# EAGLE board CT_schematic (EAGLE 7.6.0)

Size 100 x 80 mm. Coordinates in mm from the lower left corner, seen from the top.
Outline: 0,0 100,0 100,80 0,80 0,0
Copper layers (1*16): Top 0.035mm / dielectric 1.5mm / Bottom 0.035mm
Design rules "default": minimum track width 10mil, minimum drill 24mil, track to track 8mil, track to pad 8mil, pad to pad 8mil, via to via 8mil, smd to smd 8mil, copper to edge 40mil, drill to drill 8mil, minimum pad ring 10mil, minimum via ring 8mil, stop-mask expansion 4mil, vias tented up to drill 0mil, thermal gap 10mil

## Footprints (pad centres in the part's own frame; a part is rotated, then mirrored left to right if it is on the bottom)
C0603 = smd 0.8 x 0.8: 1 -0.762,0; 2 0.762,0
C0402 = smd 0.5 x 0.5: 1 -0.508,0; 2 0.508,0
C1210 = smd 1.2 x 2.5: 1 -1.524,0; 2 1.524,0
C0805 = smd 1.2 x 1.3: 1 -1.016,0; 2 1.016,0
R0603 = smd 0.8 x 0.8: 1 -0.762,0; 2 0.762,0
EXV-9H = smd 3.505 x 1.676: 1 -2.857,0; 2 2.857,0
L0603 = smd 0.8 x 0.8: 1 -0.762,0; 2 0.762,0
PJ-037B_PACKAGE = drill 3.7 square: 1 12,0 | drill 3.2 square: 2 6,0
UFQFPN48 = smd 0.559 x 0.305: 1 -3.375,2.751; 2 -3.375,2.251; 3 -3.375,1.75; 4 -3.375,1.25; 5 -3.375,0.75; 6 -3.375,0.25; 7 -3.375,-0.25; 8 -3.375,-0.75; 9 -3.375,-1.25; 10 -3.375,-1.75; 11 -3.375,-2.251; 12 -3.375,-2.751; 25 3.375,-2.751; 26 3.375,-2.251; 27 3.375,-1.75; 28 3.375,-1.25; 29 3.375,-0.75; 30 3.375,-0.25; 31 3.375,0.25; 32 3.375,0.75; 33 3.375,1.25; 34 3.375,1.75; 35 3.375,2.251; 36 3.375,2.751 | smd 0.305 x 0.559: 13 -2.751,-3.375; 14 -2.251,-3.375; 15 -1.75,-3.375; 16 -1.25,-3.375; 17 -0.75,-3.375; 18 -0.25,-3.375; 19 0.25,-3.375; 20 0.75,-3.375; 21 1.25,-3.375; 22 1.75,-3.375; 23 2.251,-3.375; 24 2.751,-3.375; 37 2.751,3.375; 38 2.251,3.375; 39 1.75,3.375; 40 1.25,3.375; 41 0.75,3.375; 42 0.25,3.375; 43 -0.25,3.375; 44 -0.75,3.375; 45 -1.25,3.375; 46 -1.75,3.375; 47 -2.251,3.375; 48 -2.751,3.375 | smd 5.588 x 5.588: 49 0,0
SOT-23-6 = smd 1.1 x 0.6: 1 -1.4,0.95; 2 -1.4,0; 3 -1.4,-0.95; 4 1.4,-0.95; 5 1.4,0; 6 1.4,0.95
AT24C02D = smd 1.6 x 0.6: 1 -2.475,1.905 | smd 1.55 x 0.6: 2 -2.475,0.635; 3 -2.475,-0.635; 4 -2.475,-1.905; 5 2.475,-1.905; 6 2.475,-0.635; 7 2.475,0.635; 8 2.475,1.905
QFN-32 = smd 0.6 x 0.3: 1 -2.3,1.75; 2 -2.3,1.25; 3 -2.3,0.75; 4 -2.3,0.25; 5 -2.3,-0.25; 6 -2.3,-0.75; 7 -2.3,-1.25; 8 -2.3,-1.75; 17 2.3,-1.75; 18 2.3,-1.25; 19 2.3,-0.75; 20 2.3,-0.25; 21 2.3,0.25; 22 2.3,0.75; 23 2.3,1.25; 24 2.3,1.75 | smd 0.3 x 0.6: 9 -1.75,-2.3; 10 -1.25,-2.3; 11 -0.75,-2.3; 12 -0.25,-2.3; 13 0.25,-2.3; 14 0.75,-2.3; 15 1.25,-2.3; 16 1.75,-2.3; 25 1.75,2.3; 26 1.25,2.3; 27 0.75,2.3; 28 0.25,2.3; 29 -0.25,2.3; 30 -0.75,2.3; 31 -1.25,2.3; 32 -1.75,2.3 | smd 3.2 x 3.2: EXP 0,0
SJ-43515TS-SMT-TR = smd 2.2 x 3: 1 0.6,-7.4; 4 3.4,-7.4 | smd 3 x 3: 2 12.8,-7.4; 5 17,-3 | smd 2 x 3: 3 5.3,0; 6 2.5,0 | drill 1.8: P$7 4.5,-3.69; P$8 11.54,-3.69
WM-64PC = drill 0.6 pad 1: 1 -1,0.95; 2 -1,-0.95
SI7034-A10-IM = smd 0.75 x 0.4: 1 -1,0.5; 2 -1,-0.5; 4 1,-0.5; 5 1,0.5 | smd 0.8 x 1.7: 3 0,0
USB-A-H = drill 0.914: 1 2.718,3.493; 2 2.718,1.003; 3 2.718,-1.003; 4 2.718,-3.493 | drill 2.311: 5 0,-6.566; 6 0,6.566
SOT143B = smd 1 x 0.7: 1 -0.75,-1 | smd 0.6 x 0.7: 2 0.95,-1; 3 0.95,1; 4 -0.95,1
QFN-28 = smd 0.813 x 0.305: 1 -2.451,1.5; 2 -2.451,1; 3 -2.451,0.5; 4 -2.451,0; 5 -2.451,-0.5; 6 -2.451,-1; 7 -2.451,-1.5; 15 2.451,-1.5; 16 2.451,-1; 17 2.451,-0.5; 18 2.451,0; 19 2.451,0.5; 20 2.451,1; 21 2.451,1.5 | smd 0.305 x 0.813: 8 -1.5,-2.451; 9 -1,-2.451; 10 -0.5,-2.451; 11 0,-2.451; 12 0.5,-2.451; 13 1,-2.451; 14 1.5,-2.451; 22 1.5,2.451; 23 1,2.451; 24 0.5,2.451; 25 0,2.451; 26 -0.5,2.451; 27 -1,2.451; 28 -1.5,2.451 | smd 3.607 x 3.607: 29 0,0
ABS07-32.768KHZ-7-T = smd 1.1 x 2.4: 1 -2.5,0; 2 0,0
ABLS-12.288MHZ-B4-T = smd 5.6 x 2.8: 1 -3.81,0; 2 5.69,0
ASFL1 = smd 1.7 x 1.5: 1 -1.27,-1.1; 2 1.27,-1.1; 3 1.27,1.1; 4 -1.27,1.1
WSON-8 = smd 0.3 x 0.6: 1 -0.75,0; 2 0.05,0; 3 0.85,0; 4 1.65,0; 5 1.65,3.8; 6 0.85,3.8; 7 0.05,3.8; 8 -0.75,3.8 | smd 3 x 2.6: PAD 0.45,1.9
SON-6 = smd 0.55 x 0.3: 1 -0.355,0.5 | smd 0.52 x 0.3: 2 -0.37,0; 3 -0.37,-0.5; 4 0.37,-0.5; 5 0.37,0; 6 0.37,0.5
SW_4-1437565-2 = smd 1.4 x 2.1: 1 -2.23,4.55; 2 -2.23,-4.55; 3 2.23,4.55; 4 2.23,-4.55
LGM67K-G1J2-24-Z = smd 0.8 x 1.4: A -2,0; C 0,0
NC7SZ125M5X = smd 1.3 x 0.7: 1 -1.3,0.95; 2 -1.3,0; 3 -1.3,-0.95; 4 1.3,-0.95; 5 1.3,0.95

## Placement (x,y rotation side)
C1  1e-06  [C0603]  -46.99,87.63 0 top  (outside the outline)
C2  1e-07  [C0603]  -50.8,87.63 0 top  (outside the outline)
C3  1e-07  [C0603]  -54.61,87.63 0 top  (outside the outline)
C4  1e-07  [C0603]  -58.42,87.63 0 top  (outside the outline)
C5  1e-07  [C0603]  -62.23,87.63 0 top  (outside the outline)
C6  1e-07  [C0603]  -66.04,87.63 0 top  (outside the outline)
C7  4.7e-06  [C0603]  -39.37,87.63 0 top  (outside the outline)
C8  2.2e-06  [C0603]  -43.18,87.63 0 top  (outside the outline)
C9  1e-08  [C0603]  -69.85,87.63 0 top  (outside the outline)
C10  1e-06  [C0603]  -73.66,87.63 0 top  (outside the outline)
C11  1e-11  [C0402]  -19.05,97.79 0 top  (outside the outline)
C12  1e-11  [C0402]  -22.86,97.79 0 top  (outside the outline)
C13  1e-08  [C0402]  -26.67,97.79 0 top  (outside the outline)
C14  1e-06  [C0603]  -77.47,87.63 0 top  (outside the outline)
C15  1e-06  [C0603]  -81.28,87.63 0 top  (outside the outline)
C16  1e-06  [C0603]  -85.09,87.63 0 top  (outside the outline)
C17  1e-06  [C0603]  -88.9,87.63 0 top  (outside the outline)
C18  1e-06  [C0603]  -92.71,87.63 0 top  (outside the outline)
C19  1e-06  [C0603]  -15.24,92.71 0 top  (outside the outline)
C20  1e-06  [C0603]  -19.05,92.71 0 top  (outside the outline)
C21  1e-07  [C0402]  -30.48,97.79 0 top  (outside the outline)
C22  1e-07  [C0402]  -34.29,97.79 0 top  (outside the outline)
C23  1e-07  [C0402]  -38.1,97.79 0 top  (outside the outline)
C24  1e-07  [C0402]  -41.91,97.79 0 top  (outside the outline)
C25  1e-06  [C0603]  -22.86,92.71 0 top  (outside the outline)
C26  1e-07  [C0402]  -45.72,97.79 0 top  (outside the outline)
C27  2.2e-05  [C1210]  -87.63,68.58 0 top  (outside the outline)
C28  2.2e-05  [C1210]  -16.51,77.47 0 top  (outside the outline)
C29  1e-09  [C0402]  -49.53,97.79 0 top  (outside the outline)
C30  1e-09  [C0402]  -53.34,97.79 0 top  (outside the outline)
C31  1e-07  [C0402]  -57.15,97.79 0 top  (outside the outline)
C32  1e-07  [C0402]  -60.96,97.79 0 top  (outside the outline)
C33  1e-07  [C0402]  -64.77,97.79 0 top  (outside the outline)
C34  1e-07  [C0402]  -68.58,97.79 0 top  (outside the outline)
C35  1e-07  [C0402]  -72.39,97.79 0 top  (outside the outline)
C36  1e-05  [C0805]  -58.42,76.2 0 top  (outside the outline)
C37  1e-05  [C0805]  -63.5,76.2 0 top  (outside the outline)
C38  1e-05  [C0805]  -68.58,76.2 0 top  (outside the outline)
C39  1e-05  [C0805]  -73.66,76.2 0 top  (outside the outline)
C40  1e-05  [C0805]  -78.74,76.2 0 top  (outside the outline)
C41  2.2e-11  [C0402]  -92.71,92.71 0 top  (outside the outline)
C42  2.2e-11  [C0402]  -15.24,97.79 0 top  (outside the outline)
C43  1e-08  [C0402]  -76.2,97.79 0 top  (outside the outline)
C44  1e-08  [C0402]  -80.01,97.79 0 top  (outside the outline)
C45  1e-08  [C0402]  -83.82,97.79 0 top  (outside the outline)
C46  1e-05  [C1210]  -22.86,77.47 0 top  (outside the outline)
C47  1e-05  [C0805]  -83.82,76.2 0 top  (outside the outline)
C48  8e-07  [R0603]  -26.67,92.71 0 top  (outside the outline)
C49  1e-05  [C1210]  -29.21,77.47 0 top  (outside the outline)
C50  1e-08  [C0402]  -87.63,97.79 0 top  (outside the outline)
C51  1e-05  [C1210]  -35.56,77.47 0 top  (outside the outline)
C52  1e-05  [C1210]  -41.91,77.47 0 top  (outside the outline)
C53  1e-07  [C0402]  -91.44,97.79 0 top  (outside the outline)
C54  0.0001  [EXV-9H]  -82.55,59.69 0 top  (outside the outline)
C55  0.0001  [EXV-9H]  -17.78,69.85 0 top  (outside the outline)
C56  1e-08  [C0402]  -15.24,102.87 0 top  (outside the outline)
F1  240.0  [L0603]  -30.48,92.71 0 top  (outside the outline)
J1  PJ-037B  [PJ-037B_PACKAGE]  -55.88,38.1 0 top  (outside the outline)
R1  10000.0  [R0603]  -45.72,82.55 0 top  (outside the outline)
R2  1000.0  [R0603]  -34.29,92.71 0 top  (outside the outline)
R3  910.0  [R0603]  -38.1,92.71 0 top  (outside the outline)
R4  4700.0  [R0603]  -41.91,92.71 0 top  (outside the outline)
R5  2200.0  [R0603]  -45.72,92.71 0 top  (outside the outline)
R6  2200.0  [R0603]  -49.53,92.71 0 top  (outside the outline)
R7  2200.0  [R0603]  -53.34,92.71 0 top  (outside the outline)
R8  2200.0  [R0603]  -57.15,92.71 0 top  (outside the outline)
R9  47000.0  [R0603]  -50.8,82.55 0 top  (outside the outline)
R10  10000.0  [R0603]  -55.88,82.55 0 top  (outside the outline)
R11  1270.0  [R0603]  -60.96,92.71 0 top  (outside the outline)
R12  10000.0  [R0603]  -60.96,82.55 0 top  (outside the outline)
R13  10000.0  [R0603]  -66.04,82.55 0 top  (outside the outline)
R14  10000.0  [R0603]  -71.12,82.55 0 top  (outside the outline)
R15  10000.0  [R0603]  -76.2,82.55 0 top  (outside the outline)
R16  10000.0  [R0603]  -81.28,82.55 0 top  (outside the outline)
R17  10000.0  [R0603]  -86.36,82.55 0 top  (outside the outline)
R18  1270.0  [R0603]  -64.77,92.71 0 top  (outside the outline)
R19  1270.0  [R0603]  -68.58,92.71 0 top  (outside the outline)
R20  47000.0  [R0603]  -91.44,82.55 0 top  (outside the outline)
R21  47000.0  [R0603]  -15.24,87.63 0 top  (outside the outline)
R22  47000.0  [R0603]  -20.32,87.63 0 top  (outside the outline)
R23  680.0  [R0603]  -72.39,92.71 0 top  (outside the outline)
R24  100000.0  [R0603]  -15.24,82.55 0 top  (outside the outline)
R25  806.0  [R0603]  -76.2,92.71 0 top  (outside the outline)
R26  1000.0  [R0603]  -80.01,92.71 0 top  (outside the outline)
R27  100000.0  [R0603]  -20.32,82.55 0 top  (outside the outline)
R28  153694.38  [R0603]  -88.9,76.2 0 top  (outside the outline)
R29  100000.0  [R0603]  -25.4,82.55 0 top  (outside the outline)
R30  100000.0  [R0603]  -30.48,82.55 0 top  (outside the outline)
R31  3900.0  [R0603]  -83.82,92.71 0 top  (outside the outline)
R32  1000.0  [R0603]  -87.63,92.71 0 top  (outside the outline)
R33  10000.0  [R0603]  -25.4,87.63 0 top  (outside the outline)
R34  10000.0  [R0603]  -30.48,87.63 0 top  (outside the outline)
R35  82000.0  [R0603]  -35.56,87.63 0 top  (outside the outline)
R36  300000.0  [R0603]  -35.56,82.55 0 top  (outside the outline)
R37  120000.0  [R0603]  -40.64,82.55 0 top  (outside the outline)
U1  STM32F411CEU6  [UFQFPN48]  -36.83,60.96 0 top  (outside the outline)
U2  MAX4995AAUT+T  [SOT-23-6]  -46.99,76.2 0 top  (outside the outline)
U3  AT24C02D-SSHM-T  [AT24C02D]  -40.64,50.8 0 top  (outside the outline)
U4  SGTL5000XNAA3  [QFN-32]  -22.86,50.8 0 top  (outside the outline)
U5  SJ-43515TS-SMT-TR  [SJ-43515TS-SMT-TR]  -55.88,10.16 0 top  (outside the outline)
U6  SJ-43515TS-SMT-TR  [SJ-43515TS-SMT-TR]  -83.82,10.16 0 top  (outside the outline)
U7  SJ-43515TS-SMT-TR  [SJ-43515TS-SMT-TR]  -39.37,26.67 0 top  (outside the outline)
U8  WM-64PCT  [WM-64PC]  -83.82,36.83 0 top  (outside the outline)
U9  Si7034-A10-IM  [SI7034-A10-IM]  -31.75,101.6 0 top  (outside the outline)
U10  61400416021  [USB-A-H]  -19.05,8.89 0 top  (outside the outline)
U11  prtr5v0u2ax  [SOT143B]  -27.94,102.87 0 top  (outside the outline)
U12  WM8731CLSEFL  [QFN-28]  -80.01,69.85 0 top  (outside the outline)
U13  SJ-43515TS-SMT-TR  [SJ-43515TS-SMT-TR]  -67.31,26.67 0 top  (outside the outline)
U14  SJ-43515TS-SMT-TR  [SJ-43515TS-SMT-TR]  -39.37,40.64 0 top  (outside the outline)
U15  ABS07-32.768KHZ-7-T  [ABS07-32.768KHZ-7-T]  -58.42,69.85 0 top  (outside the outline)
U16  ABLS-12.288MHZ-B4-T  [ABLS-12.288MHZ-B4-T]  -35.56,69.85 0 top  (outside the outline)
U17  ASFL-24.57MHZ-NCS  [ASFL1]  -57.15,60.96 0 top  (outside the outline)
U18  ASFL1-25MHZ-NCS  [ASFL1]  -73.66,60.96 0 top  (outside the outline)
U19  LP3878SDX-ADJ/NOPB  [WSON-8]  -62.23,48.26 0 top  (outside the outline)
U20  LP2951ACSDX/NOPB  [WSON-8]  -29.21,58.42 0 top  (outside the outline)
U21  LP3878SDX-ADJ/NOPB  [WSON-8]  -82.55,48.26 0 top  (outside the outline)
U22  TPS3895ADRYR  [SON-6]  -35.56,101.6 0 top  (outside the outline)
U23  4-1437565-2  [SW_4-1437565-2]  -72.39,38.1 0 top  (outside the outline)
U24  Q65110A2395  [LGM67K-G1J2-24-Z]  -67.31,68.58 0 top  (outside the outline)
U25  nc7sz125m5x  [NC7SZ125M5X]  -52.07,76.2 0 top  (outside the outline)

## Library data of the parts
C1-C56 F1 J1 R1-R37 U1-U25 = circuit_tree

## Nets
CLK_CRYSTAL_U1_3: C11.1 U1.3 U15.1
CLK_CRYSTAL_U1_4: C12.1 U1.4 U15.2
CLK_CRYSTAL_U12_1: C41.1 U12.1 U16.1
CLK_CRYSTAL_U12_2: C42.1 U12.2 U16.2
CLK_U1_5: U1.5 U18.3
CLK_U4_21: U4.21 U17.3
GND: C1.2 C2.2 C3.2 C4.2 C5.2 C6.2 C7.2 C8.2 C9.2 C10.2 C11.2 C12.2 C13.2 C21.2 C22.2 C23.2 C24.2 C25.2 C26.2 C30.2 C31.2 C32.2 C33.2 C34.2 C35.2 C36.2 C37.2 C38.2 C39.2 C40.2 C41.2 C42.2 C43.2 C44.2 C45.2 C46.2 C47.2 C48.2 C49.2 C50.2 C51.2 C52.2 C53.2 C54.2 C55.2 C56.2 J1.2 R2.2 R9.2 R10.2 R11.2 R13.2 R14.2 R16.2 R17.2 R19.2 R20.2 R21.2 R22.2 R26.2 R29.2 R32.2 R35.2 R37.2 U1.8 U1.23 U1.35 U1.47 U1.49 U2.2 U3.4 U4.1 U4.3 U4.7 U4.EXP U6.1 U7.1 U8.2 U9.5 U10.4 U10.5 U10.6 U11.1 U12.4 U12.15 U12.19 U12.25 U12.26 U12.29 U13.1 U14.1 U17.2 U18.2 U19.3 U19.PAD U20.3 U20.4 U20.PAD U21.3 U21.PAD U22.2 U24.C U25.1 U25.3
NET_U1_7: R4.1 U1.7 U25.4
NET_U1_9: C9.1 C10.1 F1.1 U1.9
NET_U1_21: R7.1 U1.21 U3.6
NET_U1_22: C8.1 U1.22
NET_U1_31: R11.1 U1.31
NET_U1_39: R8.1 U1.39 U3.5
NET_U1_42: R5.1 U1.42 U9.2
NET_U1_43: R6.1 U1.43 U9.4
NET_U1_44: R10.1 U1.44
NET_U1_45: R3.1 U1.45 U24.A
NET_U1_46: R1.1 U1.46 U23.3 U23.4
NET_U2_3: R9.1 U2.3
NET_U3_1: R15.1 U3.1
NET_U3_2: R16.1 U3.2
NET_U3_3: R17.1 U3.3
NET_U3_7: R14.1 U3.7
NET_U4_10: C24.1 U4.10
NET_U4_29: R18.1 U4.29
NET_U4_31: R19.1 U4.31
NET_U5_1: U4.4 U5.1
NET_U5_2: U4.2 U5.2
NET_U5_5: U4.6 U5.5
NET_U6_2: C15.1 U6.2
NET_U6_5: C14.1 U6.5
NET_U6_11: C15.2
NET_U6_12: C14.2
NET_U7_2: C17.1 C18.1 U7.2
NET_U7_5: C16.1 U7.5
NET_U7_13: C17.2 C18.2
NET_U7_14: C16.2
NET_U8_1: C19.1 C20.1 C25.1 U4.16 U8.1
NET_U8_15: C19.2 C20.2
NET_U12_9: U12.9
NET_U12_20: C35.1 C40.1 U12.20
NET_U13_2: C28.1 R21.1 U13.2
NET_U13_5: C27.1 R20.1 U13.5
NET_U13_13: C27.2
NET_U13_14: C28.2
NET_U14_5: C29.1 C30.1 R22.1 R23.1 U14.5
NET_U14_21: R23.2
NET_U14_22: C29.2
NET_U19_1: C45.1 U19.1
NET_U19_6: R25.2 R26.1 U19.6
NET_U19_8: R24.1 U19.8
NET_U20_5: R27.1 U20.5
NET_U20_7: R28.2 R29.1 U20.7
NET_U21_1: C50.1 U21.1
NET_U21_6: R31.2 R32.1 U21.6
NET_U21_8: R30.1 U21.8
NET_U22_1: R34.1 R35.1 U22.1
NET_U22_3: R36.2 R37.1 U22.3
NET_U22_4: R33.1 U22.4 U25.2
NET_U23_1: R2.1 U23.1 U23.2
PROC_GPIO_TO_U1_USB_FAULT: R12.1 U1.6 U2.6
PROC_GPIO_TO_U1_VBUS_EN: R13.1 U1.2 U2.4
PROC_I2S1_CK: U1.15 U4.24
PROC_I2S1_SD: U1.17 U4.26
PROC_I2S1_WS: U1.14 U4.23
PROC_I2S2_CK: U1.26 U12.7
PROC_I2S2_EXT_SD: U1.27 U12.10
PROC_I2S2_SD: U1.28 U12.8
PROC_I2S2_WS: U1.25 U12.9 U12.11
PROC_USB_OTG_FS_DM: U1.32 U10.2 U11.3
PROC_USB_OTG_FS_DP: U1.33 U10.3 U11.2
PROC_USB_OTG_FS_VBUS: U1.30 U2.1 U10.1 U11.4
VCC_S1_11V5: C46.1 C48.1 C51.1 C54.1 C55.1 J1.1 R24.2 R30.2 U19.4 U20.8 U21.4
VCC_TIER1_1V8: C1.1 C2.1 C3.1 C4.1 C5.1 C6.1 C7.1 C13.1 C21.1 C22.1 C23.1 C26.1 C31.1 C32.1 C33.1 C34.1 C36.1 C37.1 C38.1 C39.1 C47.1 C53.1 C56.1 F1.2 R1.2 R3.2 R4.2 R5.2 R6.2 R7.2 R8.2 R12.2 R15.2 R18.2 R25.1 R33.2 R34.2 R36.1 U1.1 U1.24 U1.36 U1.48 U3.8 U4.5 U4.20 U4.30 U9.1 U12.3 U12.5 U12.12 U12.18 U19.5 U22.6 U25.5
VCC_TIER1_3V3: C43.1 C44.1 C49.1 R27.2 R28.1 U17.4 U18.4 U20.1
VCC_TIER1_5V0: C52.1 R31.1 U2.5 U21.5

## Tracks (layer width: path | path; a pad name or v marks a point on that pad's centre or on a via)
CLK_CRYSTAL_U1_3  (2 unrouted)
CLK_CRYSTAL_U1_4  (2 unrouted)
CLK_CRYSTAL_U12_1  (2 unrouted)
CLK_CRYSTAL_U12_2  (2 unrouted)
CLK_U1_5  (1 unrouted)
CLK_U4_21  (1 unrouted)
GND  (103 unrouted)
NET_U1_7  (2 unrouted)
NET_U1_9  (3 unrouted)
NET_U1_21  (2 unrouted)
NET_U1_22  (1 unrouted)
NET_U1_31  (1 unrouted)
NET_U1_39  (2 unrouted)
NET_U1_42  (2 unrouted)
NET_U1_43  (2 unrouted)
NET_U1_44  (1 unrouted)
NET_U1_45  (2 unrouted)
NET_U1_46  (3 unrouted)
NET_U2_3  (1 unrouted)
NET_U3_1  (1 unrouted)
NET_U3_2  (1 unrouted)
NET_U3_3  (1 unrouted)
NET_U3_7  (1 unrouted)
NET_U4_10  (1 unrouted)
NET_U4_29  (1 unrouted)
NET_U4_31  (1 unrouted)
NET_U5_1  (1 unrouted)
NET_U5_2  (1 unrouted)
NET_U5_5  (1 unrouted)
NET_U6_2  (1 unrouted)
NET_U6_5  (1 unrouted)
NET_U7_2  (2 unrouted)
NET_U7_5  (1 unrouted)
NET_U7_13  (1 unrouted)
NET_U8_1  (4 unrouted)
NET_U8_15  (1 unrouted)
NET_U12_20  (2 unrouted)
NET_U13_2  (2 unrouted)
NET_U13_5  (2 unrouted)
NET_U14_5  (4 unrouted)
NET_U19_1  (1 unrouted)
NET_U19_6  (2 unrouted)
NET_U19_8  (1 unrouted)
NET_U20_5  (1 unrouted)
NET_U20_7  (2 unrouted)
NET_U21_1  (1 unrouted)
NET_U21_6  (2 unrouted)
NET_U21_8  (1 unrouted)
NET_U22_1  (2 unrouted)
NET_U22_3  (2 unrouted)
NET_U22_4  (2 unrouted)
NET_U23_1  (2 unrouted)
PROC_GPIO_TO_U1_USB_FAULT  (2 unrouted)
PROC_GPIO_TO_U1_VBUS_EN  (2 unrouted)
PROC_I2S1_CK  (1 unrouted)
PROC_I2S1_SD  (1 unrouted)
PROC_I2S1_WS  (1 unrouted)
PROC_I2S2_CK  (1 unrouted)
PROC_I2S2_EXT_SD  (1 unrouted)
PROC_I2S2_SD  (1 unrouted)
PROC_I2S2_WS  (2 unrouted)
PROC_USB_OTG_FS_DM  (2 unrouted)
PROC_USB_OTG_FS_DP  (2 unrouted)
PROC_USB_OTG_FS_VBUS  (3 unrouted)
VCC_S1_11V5  (10 unrouted)
VCC_TIER1_1V8  (53 unrouted)
VCC_TIER1_3V3  (7 unrouted)
VCC_TIER1_5V0  (3 unrouted)